# Altium PCB classyTKL_MXHS.PcbDoc (part 1 of 2)
Units mm, origin at the board's own origin, x right, y up, seen from the top; angles counter-clockwise.
Board outline 346.59 x 122.85 mm, 2 copper layers (Component Side, Bottom Layer), stack 1.571 mm thick; 194 components, 125 nets, 948 pads, 130 vias.
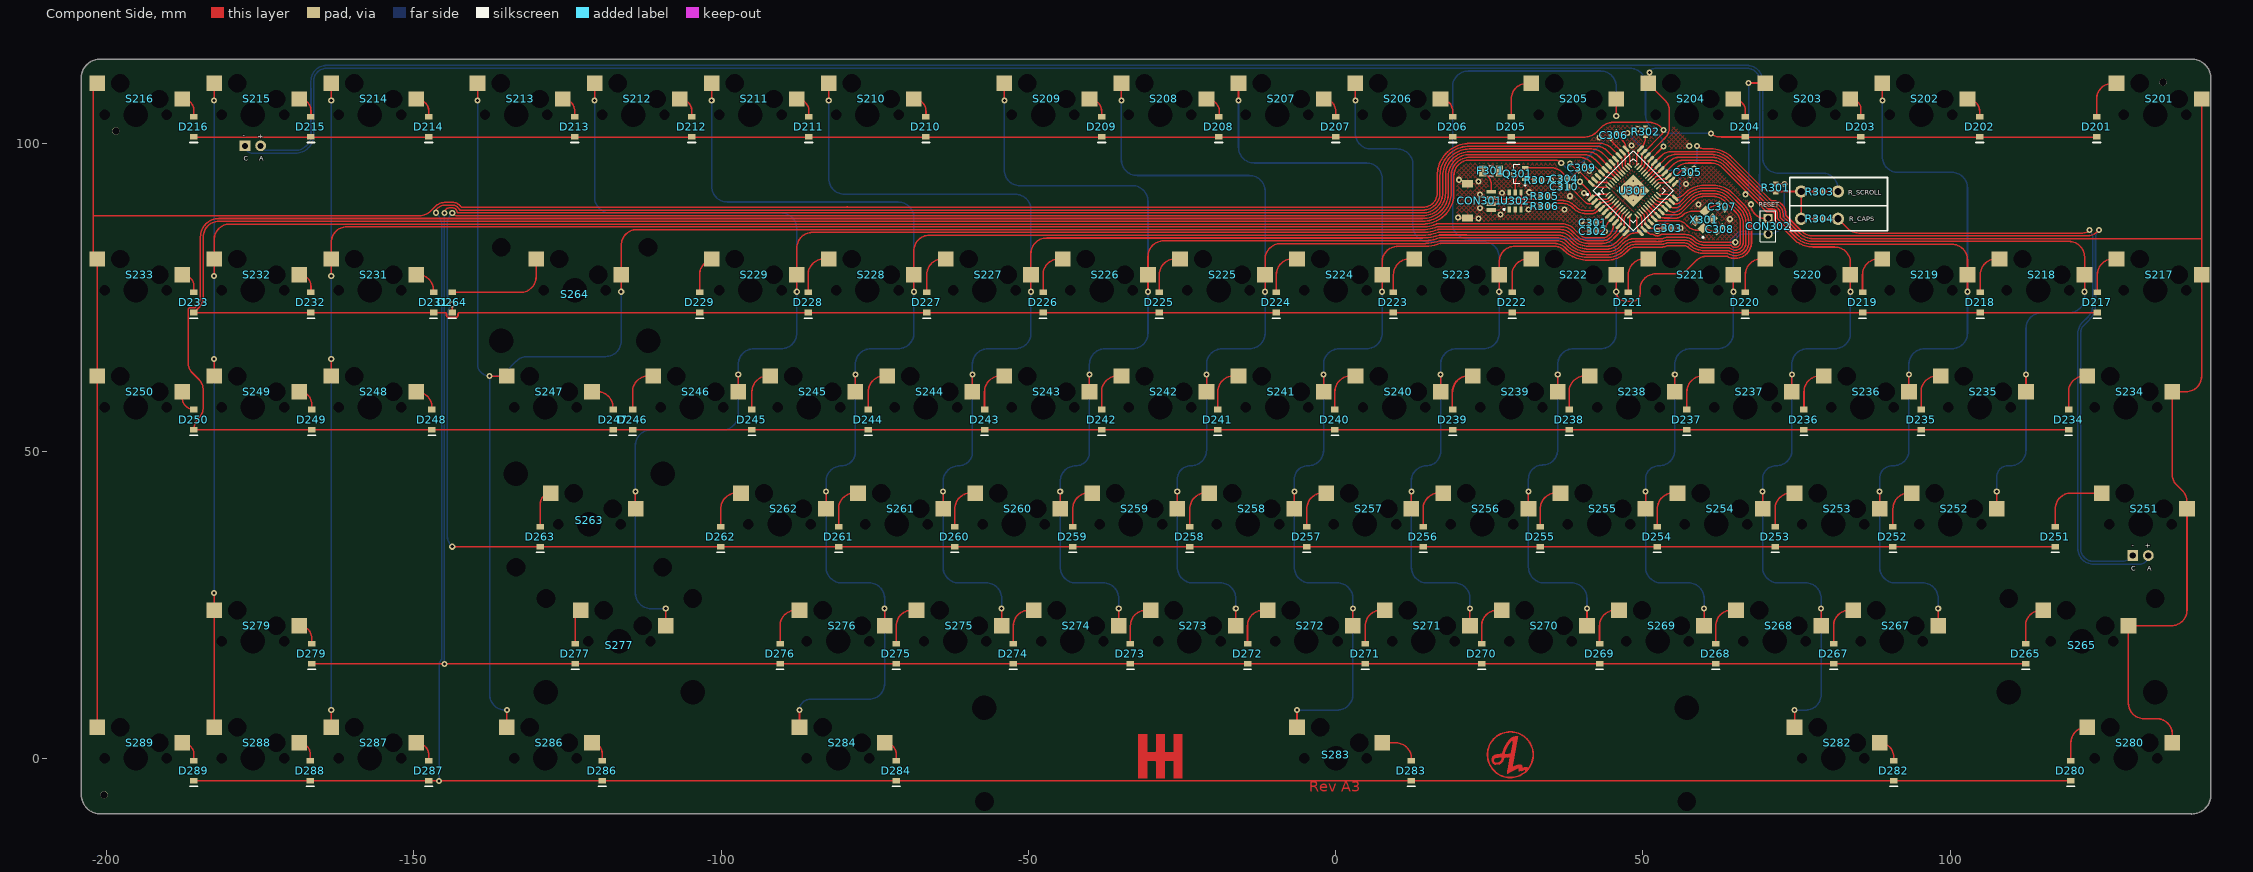
[diagram p0: Component Side view]
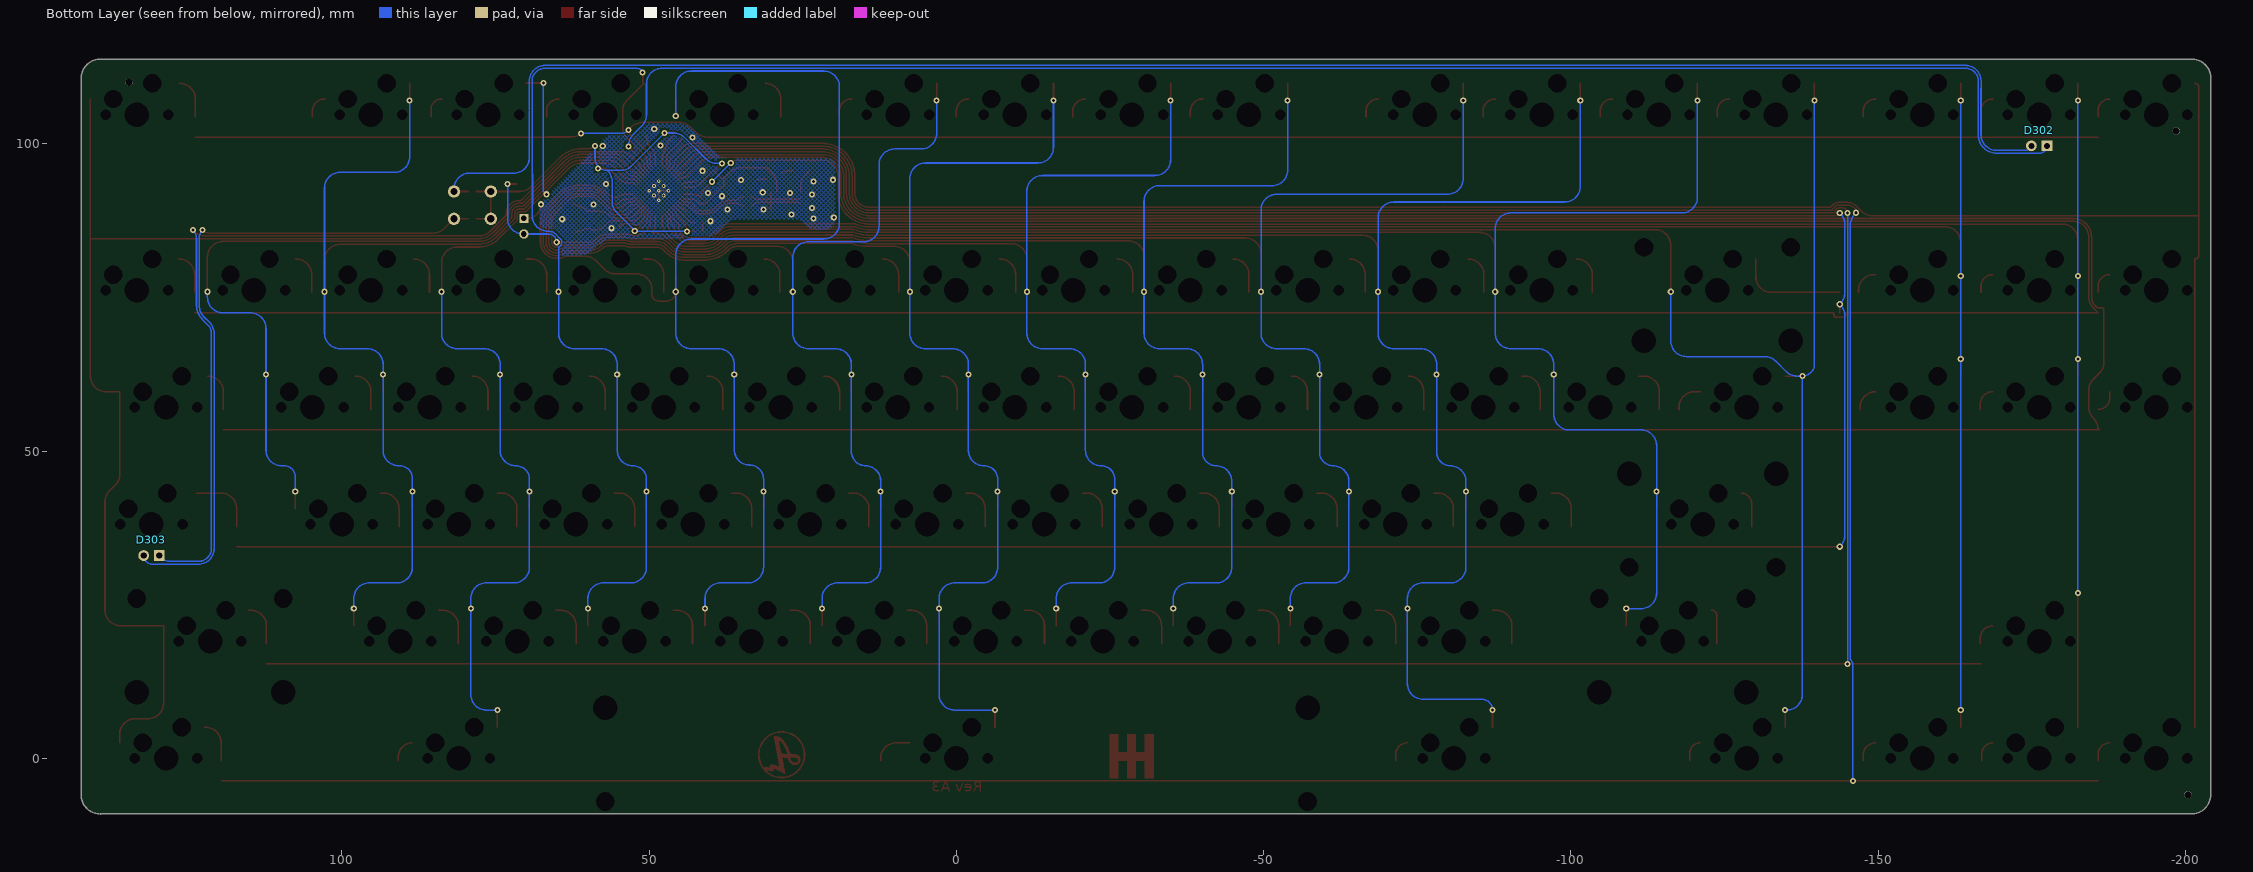
[diagram p1: Bottom Layer view, seen from below]
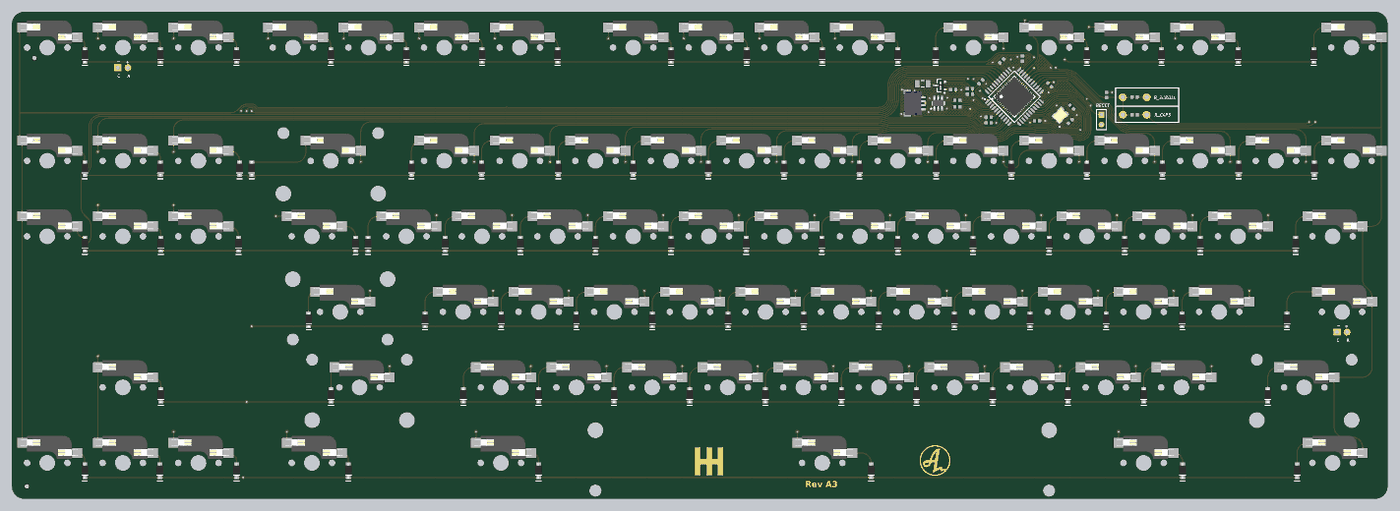
[diagram p3: 3D render of the assembled board from above, using the file's embedded part models]
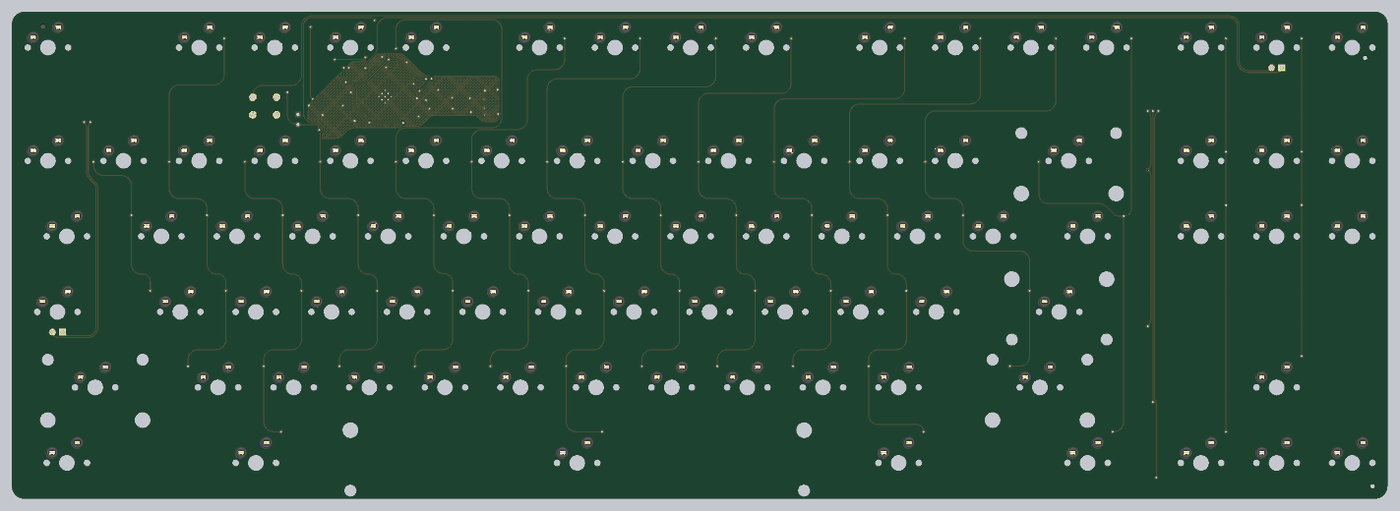
[diagram p4: 3D render of the assembled board from below, using the file's embedded part models]

## Layer stack, top to bottom
Top Solder: solder mask 0.0102, Solder Resist, Dk 3.5
Component Side: signal copper 0.0356
Dielectric 1: core 1.5, FR-4, Dk 4.2
Bottom Layer: signal copper 0.0356
Solder Side: solder mask 0.0102, Solder Resist, Dk 3.5

## Board outline
-204.127,-5.981 cw(c-204.032,-5.896) -204.159,-5.896 -204.159,110.685 cw(c-201.032,110.685) -201.032,113.812 cw(c-201.032,113.685) -200.974,113.798 139.295,113.798 cw(c139.295,110.671) 142.423,110.671 142.423,-5.883 cw(c142.299,-5.915) 142.427,-5.915 cw(c139.299,-5.915) 139.299,-9.042 cw(c139.299,-8.915) 139.233,-9.023 -201,-9.023 cw(c-201,-5.896)

## Design rules (kind name [scope] priority, off if disabled: settings)
Clearance [All] p1: gap=0.2 ignorepadtopadclearanceinfootprint=FALSE except(0: Arc-Hole Track-Hole SMDPad-Hole THPad-Hole Via-Hole Fill-Hole Poly-Hole Region-Hole Text-Hole; 0.254: THPad-THPad THPad-Via THPad-Fill THPad-Poly THPad-Region THPad-Text Via-Via Via-Fill Via-Poly Via-Region Via-Text Fill-Fill Fill-Poly Fill-Region Fill-Text Poly-Poly Poly-Region Poly-Text Region-Region Region-Text Text-Text)
ComponentClearance [InComponent('No Component') And OnLayer('Component Side')] p1: gap=0.254 collisioncheckmode=3 verticalgap=0.254 showdistances=FALSE
DiffPairsRouting DiffPairsRouting_USB [InDifferentialPairClass('All Differential Pairs')] p1: maxlimit=0.254 minlimit=0.203 mostfreqgap=0.203 toplayer_minwidth=0.152 toplayer_maxwidth=0.381 toplayer_prefwidth=0.152 bottomlayer_minwidth=0.152 bottomlayer_maxwidth=0.381 bottomlayer_prefwidth=0.152 maxuncoupledlength=12.7
DiffPairsRouting [All] p2: maxlimit=0.254 minlimit=0.254 mostfreqgap=0.254 toplayer_minwidth=0.381 toplayer_maxwidth=0.381 toplayer_prefwidth=0.381 bottomlayer_minwidth=0.381 bottomlayer_maxwidth=0.381 bottomlayer_prefwidth=0.381 maxuncoupledlength=12.7
HoleSize [All] p1: absolutevalues=TRUE maxlimit=20 minlimit=0.025 maxpercent=80.000 minpercent=20.000
MatchedLengths MatchedLengths_USB_DiffPairs_1 [All] p1: tolerance=0.127 checknetsindiffpair=TRUE checkdiffpairvsdiffpair=FALSE checkxsignals=FALSE checkothers=FALSE
MatchedLengths MatchedLengths_USB_DiffPairs [All] p2: tolerance=0.127 checknetsindiffpair=TRUE checkdiffpairvsdiffpair=FALSE checkxsignals=FALSE checkothers=FALSE
PolygonConnect PolygonConnect_1 [All vs IsVia] p1: connectstyle=Direct reliefconductorwidth=0.254 reliefentries=4 polygonreliefangle="90 Angle" airgapwidth=0.254
PolygonConnect [All] p2: connectstyle=Relief reliefconductorwidth=0.254 reliefentries=4 polygonreliefangle="90 Angle" airgapwidth=0.254
RoutingVias [All] p1: holewidth=0.711 width=1.27 viastyle="Through Hole" minholewidth=0.711 minwidth=1.27 maxholewidth=0.711 maxwidth=1.27
SolderMaskExpansion [All] p1: expansion=0.102 istentingtop=FALSE
Width [All] p1: maxlimit=0.254 minlimit=0.203 preferedwidth=0.254
27 further rules are at their usual default settings.

## Classes and differential pairs
component class Designator: C201 C202 C203 C204 C205 C206 D201 D202 D203 D204 D205 D206 D207 D208 D209 D210 D211 D212 D213 D214 D215 D216 D217 D218 D219 D220 D221 D222 D223 D224 D225 D226 D227 D228 D229 D231 D232 D233 D234 D235 D236 D237 D238 D239 D240 D241 D242 D243 D244 D245 D246 D247 D248 D249 D250 D251 D252 D253 D254 D255 D256 D257 D258 D259 D260 D261 D262 D263 D264 D265 D267 D268 D269 D270 D271 D272 D273 D274 D275 D276 D277 D279 D280 D282 D283 D284 D286 D287 D288 D289 S201 S202 S203 S204 S205 S206 S207 S208 S209 S210 S211 S212 S213 S214 S215 S216 S217 S218 S219 S220 S221 S222 S223 S224 S225 S226 S227 S228 S229 S231 S232 S233 S234 S235 S236 S237 S238 S239 S240 S241 S242 S243 S244 S245 S246 S247 S248 S249 S250 S251 S252 S253 S254 S255 S256 S257 S258 S259 S260 S261 S262 S263 S264 S265 S267 S268 S269 S270 S271 S272 S273 S274 S275 S276 S277 S279 S280 S282 S283 S284 S286 S287 S288 S289
differential pair D: +D_P -D_N
differential pair D_PRE: +D_PRE_P -D_PRE_N

## Components (designator, comment, footprint, x,y, rotation, side; value= is the part's Value field where it differs from the comment)
C301 "" C0603[1608] 41.915,87.178 r0 top value=1uF
C302 "" C0603[1608] 41.915,85.781 r0 top value=0.1uF
C303 "" C0603[1608] 54.107,86.289 r180 top value=0.1uF
C304 "" C0603[1608] 37.211,94.361 r0 top value=4,7uF
C305 "" C0603[1608] 57.277,95.377 r135 top value=0.1uF
C306 "" C0603[1608] 45.217,101.402 r45 top value=0.1uF
C307 "" C0603[1608] 62.865,89.789 r135 top value=15pF
C308 "" C0603[1608] 62.484,86.106 r225 top value=15pF
C309 "" C0603[1608] 40.005,96.139 r225 top value=0.1uF
C310 "" C0603[1608] 37.216,93.02 r0 top value=0.1uF
CON301 "Header 5" "JST SM04B-SRSS-TB" 21.468,93.54 r270 top
CON302 "Header 2" HDR1X2 70.358,87.884 r270 top
D201 "Diode" SOD-123 123.83,102.775 r90 top
D202 "Diode" SOD-123 104.78,102.775 r90 top
D203 "Diode" SOD-123 85.476,102.775 r90 top
D204 "Diode" SOD-123 66.68,102.775 r90 top
D205 "Diode" SOD-123 28.58,102.775 r90 top
D206 "Diode" SOD-123 19.055,102.775 r90 top
D207 "Diode" SOD-123 0.005,102.775 r90 top
D208 "Diode" SOD-123 -19.045,102.775 r90 top
D209 "Diode" SOD-123 -38.095,102.775 r90 top
D210 "Diode" SOD-123 -66.67,102.775 r90 top
D211 "Diode" SOD-123 -85.72,102.775 r90 top
D212 "Diode" SOD-123 -104.77,102.775 r90 top
D213 "Diode" SOD-123 -123.82,102.775 r90 top
D214 "Diode" SOD-123 -147.569,102.775 r90 top
D215 "Diode" SOD-123 -166.746,102.775 r90 top
D216 "Diode" SOD-123 -185.796,102.775 r90 top
D217 "Diode" SOD-123 123.957,74.2 r90 top
D218 "Diode" SOD-123 104.907,74.2 r90 top
D219 "Diode" SOD-123 85.73,74.2 r90 top
D220 "Diode" SOD-123 66.675,74.2 r90 top
D221 "Diode" SOD-123 47.63,74.2 r90 top
D222 "Diode" SOD-123 28.707,74.2 r90 top
D223 "Diode" SOD-123 9.403,74.2 r90 top
D224 "Diode" SOD-123 -9.647,74.2 r90 top
D225 "Diode" SOD-123 -28.697,74.2 r90 top
D226 "Diode" SOD-123 -47.62,74.2 r90 top
D227 "Diode" SOD-123 -66.543,74.2 r90 top
D228 "Diode" SOD-123 -85.847,74.2 r90 top
D229 "Diode" SOD-123 -103.5,74.2 r90 top
D231 "Diode" SOD-123 -146.807,74.2 r90 top
D232 "Diode" SOD-123 -166.746,74.2 r90 top
D233 "Diode" SOD-123 -185.796,74.2 r90 top
D234 "Diode" SOD-123 119.258,55.15 r90 top
D235 "Diode" SOD-123 95.255,55.15 r90 top
D236 "Diode" SOD-123 76.205,55.15 r90 top
D237 "Diode" SOD-123 57.155,55.15 r90 top
D238 "Diode" SOD-123 37.978,55.15 r90 top
D239 "Diode" SOD-123 19.055,55.15 r90 top
D240 "Diode" SOD-123 -0.122,55.15 r90 top
D241 "Diode" SOD-123 -19.172,55.15 r90 top
D242 "Diode" SOD-123 -38.095,55.15 r90 top
D243 "Diode" SOD-123 -57.145,55.15 r90 top
D244 "Diode" SOD-123 -76.068,55.15 r90 top
D245 "Diode" SOD-123 -94.991,55.15 r90 top
D246 "Diode" SOD-123 -114.422,55.15 r90 top
D247 "Diode" SOD-123 -117.597,55.15 r90 top
D248 "Diode" SOD-123 -147.061,55.15 r90 top
D249 "Diode" SOD-123 -166.619,55.15 r90 top
D250 "Diode" SOD-123 -185.796,55.15 r90 top
D251 "Diode" SOD-123 117.099,36.1 r90 top
D252 "Diode" SOD-123 90.683,36.1 r90 top
D253 "Diode" SOD-123 71.506,36.1 r90 top
D254 "Diode" SOD-123 52.329,36.1 r90 top
D255 "Diode" SOD-123 33.279,36.1 r90 top
D256 "Diode" SOD-123 14.229,36.1 r90 top
D257 "Diode" SOD-123 -4.694,36.1 r90 top
D258 "Diode" SOD-123 -23.744,36.1 r90 top
D259 "Diode" SOD-123 -42.794,36.1 r90 top
D260 "Diode" SOD-123 -61.971,36.1 r90 top
D261 "Diode" SOD-123 -80.894,36.1 r90 top
D262 "Diode" SOD-123 -100.071,36.1 r90 top
D263 "Diode" SOD-123 -129.413,36.1 r90 top
D264 "Diode" SOD-123 -143.759,74.2 r90 top
D265 "Diode" SOD-123 112.268,17.05 r90 top
D267 "Diode" SOD-123 81.031,17.05 r90 top
D268 "Diode" SOD-123 61.854,17.05 r90 top
D269 "Diode" SOD-123 42.931,17.05 r90 top
D270 "Diode" SOD-123 23.754,17.05 r90 top
D271 "Diode" SOD-123 4.831,17.05 r90 top
D272 "Diode" SOD-123 -14.346,17.05 r90 top
D273 "Diode" SOD-123 -33.396,17.05 r90 top
D274 "Diode" SOD-123 -52.446,17.05 r90 top
D275 "Diode" SOD-123 -71.496,17.05 r90 top
D276 "Diode" SOD-123 -90.419,17.05 r90 top
D277 "Diode" SOD-123 -123.75,17.05 r90 top
D279 "Diode" SOD-123 -166.619,17.05 r90 top
D280 "Diode" SOD-123 119.639,-2 r90 top
D282 "Diode" SOD-123 90.81,-2 r90 top
D283 "Diode" SOD-123 12.324,-2 r90 top
D284 "Diode" SOD-123 -71.496,-2 r90 top
D286 "Diode" SOD-123 -119.375,-2 r90 top
D287 "Diode" SOD-123 -147.569,-2 r90 top
D288 "Diode" SOD-123 -166.873,-2 r90 top
D289 "Diode" SOD-123 -185.796,-2 r90 top
D302 "LED0" "MX-SWITCH - LED" -176.213,104.775 r180 bottom
D303 "LED0" "MX-switch - LED" 130.968,38.1 r180 bottom
F301 "Fuse" C1206[3216] 25.273,95.631 r0 top
Q301 "PMOS-2" SOT-23-3 29.639,95.179 r180 top
R301 "Res1" R0603[1608] 71.628,92.837 r90 top value=10K
R302 "Res1" R0603[1608] 50.419,101.981 r90 top value=10K
R303 "Res1" "R0603[1608] - THT" 78.745,92.258 r0 top value=150
R304 "Res1" "R0603[1608] - THT" 78.745,87.813 r0 top value=150
R305 "Res1" R0603[1608] 34.041,91.496 r180 top value=22
R306 "Res1" R0603[1608] 34.041,89.845 r180 top value=22
R307 "Res1" R0603[1608] 33.02,94.107 r0 top value=10K
S201 "MX" MXHS-switch 133.349,104.775 r180 bottom locked
S202 "MX" MXHS-switch_Switched_Pol 95.249,104.775 r180 bottom locked
S203 "MX" MXHS-switch_Switched_Pol 76.199,104.775 r180 bottom locked
S204 "MX" MXHS-switch_Switched_Pol 57.149,104.775 r180 bottom locked
S205 "MX" MXHS-switch 38.099,104.775 r180 bottom locked
S206 "MX" MXHS-switch_Switched_Pol 9.494,104.775 r180 bottom locked
S207 "MX" MXHS-switch_Switched_Pol -9.526,104.775 r180 bottom locked
S208 "MX" MXHS-switch_Switched_Pol -28.576,104.775 r180 bottom locked
S209 "MX" MXHS-switch_Switched_Pol -47.626,104.775 r180 bottom locked
S210 "MX" MXHS-switch_Switched_Pol -76.201,104.775 r180 bottom locked
S211 "MX" MXHS-switch_Switched_Pol -95.251,104.775 r180 bottom locked
S212 "MX" MXHS-switch_Switched_Pol -114.301,104.775 r180 bottom locked
S213 "MX" MXHS-switch_Switched_Pol -133.351,104.775 r180 bottom locked
S214 "MX" MXHS-switch_Switched_Pol -157.162,104.775 r180 bottom locked
S215 "MX" MXHS-switch_Switched_Pol -176.213,104.775 r180 bottom locked
S216 "MX" MXHS-switch_Switched_Pol -195.263,104.775 r180 bottom locked
S217 "MX" MXHS-switch 133.349,76.2 r180 bottom locked
S218 "MX" MXHS-switch 114.299,76.2 r180 bottom locked
S219 "MX" MXHS-switch 95.249,76.2 r180 bottom locked
S220 "MX" MXHS-switch 76.199,76.2 r180 bottom locked
S221 "MX" MXHS-switch 57.149,76.2 r180 bottom locked
S222 "MX" MXHS-switch 38.099,76.2 r180 bottom locked
S223 "MX" MXHS-switch 19.049,76.2 r180 bottom locked
S224 "MX" MXHS-switch -0.001,76.2 r180 bottom locked
S225 "MX" MXHS-switch -19.051,76.2 r180 bottom locked
S226 "MX" MXHS-switch -38.101,76.2 r180 bottom locked
S227 "MX" MXHS-switch -57.151,76.2 r180 bottom locked
S228 "MX" MXHS-switch -76.201,76.2 r180 bottom locked
S229 "MX" MXHS-switch -95.251,76.2 r180 bottom locked
S231 "MX" MXHS-switch_Switched_Pol -157.162,76.2 r180 bottom locked
S232 "MX" MXHS-switch_Switched_Pol -176.213,76.2 r180 bottom locked
S233 "MX" MXHS-switch_Switched_Pol -195.263,76.2 r180 bottom locked
S234 "MX" "MXHS-switch - 1.5U" 128.587,57.15 r180 bottom locked
S235 "MX" MXHS-switch 104.774,57.15 r180 bottom locked
S236 "MX" MXHS-switch 85.724,57.15 r180 bottom locked
S237 "MX" MXHS-switch 66.674,57.15 r180 bottom locked
S238 "MX" MXHS-switch 47.624,57.15 r180 bottom locked
S239 "MX" MXHS-switch 28.574,57.15 r180 bottom locked
S240 "MX" MXHS-switch 9.524,57.15 r180 bottom locked
S241 "MX" MXHS-switch -9.526,57.15 r180 bottom locked
S242 "MX" MXHS-switch -28.576,57.15 r180 bottom locked
S243 "MX" MXHS-switch -47.626,57.15 r180 bottom locked
S244 "MX" MXHS-switch -66.676,57.15 r180 bottom locked
S245 "MX" MXHS-switch -85.726,57.15 r180 bottom locked
S246 "MX" MXHS-switch -104.776,57.15 r180 bottom locked
S247 "MX" MXHS-switch_Switched_Pol -128.588,57.15 r180 bottom locked
S248 "MX" MXHS-switch_Switched_Pol -157.162,57.15 r180 bottom locked
S249 "MX" MXHS-switch_Switched_Pol -176.213,57.15 r180 bottom locked
S250 "MX" MXHS-switch_Switched_Pol -195.263,57.15 r180 bottom locked
S251 "MX" "MXHS-switch - CAPS_stepped" 126.206,38.1 r180 bottom locked
S252 "MX" MXHS-switch 100.012,38.1 r180 bottom locked
S253 "MX" MXHS-switch 80.962,38.1 r180 bottom locked
S254 "MX" MXHS-switch 61.912,38.1 r180 bottom locked
S255 "MX" MXHS-switch 42.862,38.1 r180 bottom locked
S256 "MX" MXHS-switch 23.812,38.1 r180 bottom locked
S257 "MX" MXHS-switch 4.762,38.1 r180 bottom locked
S258 "MX" MXHS-switch -14.288,38.1 r180 bottom locked
S259 "MX" MXHS-switch -33.338,38.1 r180 bottom locked
S260 "MX" MXHS-switch -52.388,38.1 r180 bottom locked
S261 "MX" MXHS-switch -71.438,38.1 r180 bottom locked
S262 "MX" MXHS-switch -90.488,38.1 r180 bottom locked
S263 "MX" "MXHS-switch - 2.25U - rotated stab" -121.451,38.1 r180 bottom locked
S264 "MX" "MXHS-switch - 2.25U" -123.826,76.2 r180 bottom locked
S265 "MX" "MXHS-switch - 2.25U" 121.443,19.05 r180 bottom locked
S267 "MX" MXHS-switch 90.487,19.05 r180 bottom locked
S268 "MX" MXHS-switch 71.437,19.05 r180 bottom locked
S269 "MX" MXHS-switch 52.387,19.05 r180 bottom locked
S270 "MX" MXHS-switch 33.337,19.05 r180 bottom locked
S271 "MX" MXHS-switch 14.287,19.05 r180 bottom locked
S272 "MX" MXHS-switch -4.763,19.05 r180 bottom locked
S273 "MX" MXHS-switch -23.813,19.05 r180 bottom locked
S274 "MX" MXHS-switch -42.862,19.05 r180 bottom locked
S275 "MX" MXHS-switch -61.913,19.05 r180 bottom locked
S276 "MX" MXHS-switch -80.963,19.05 r180 bottom locked
S277 "MX" "MXHS-switch - 2.75U" -116.581,19.05 r180 bottom locked
S279 "MX" MXHS-switch_Switched_Pol -176.213,19.05 r180 bottom locked
S280 "MX" "MXHS-switch - 1.5U" 128.587,0 r180 bottom locked
S282 "MX" MXHS-switch_Switched_Pol 80.962,0 r180 bottom locked
S283 "MX" "MXHS-switch - 7u space" 0,0 r0 bottom locked
S284 "MX" MXHS-switch_Switched_Pol -80.962,0 r180 bottom locked
S286 "MX" MXHS-switch_Switched_Pol -128.588,0 r180 bottom locked
S287 "MX" MXHS-switch_Switched_Pol -157.163,0 r180 bottom locked
S288 "MX" MXHS-switch_Switched_Pol -176.213,0 r180 bottom locked
S289 "MX" MXHS-switch_Switched_Pol -195.263,0 r180 bottom locked
U301 "ATMEGA32U4" ATMEGA32U4-COMBO 48.411,92.392 r45 top
U302 "SRV05" SOT-23-6 29.215,90.734 r90 top
X301 "XTAL" XTAL-3225 59.949,87.686 r45 top

## Footprints (in the part's own frame and the unit in brackets; to place one, negate y for a bottom-side part, rotate by r counter-clockwise, add the part's x,y. Pads: shape width x height; smd on the part's side, far side on the other; paste and mask are expansions set on the pad)
ATMEGA32U4-COMBO [mm] "QFP, 44-Leads, Body 9,95x9,95mm, Pitch 0,80mm, IPC Medium Density"
  rect 1.35x0.5 smd: 1(-5.675,4)
  oval 1.05x0.25 smd: 1(-3.325,2.5) 2(-3.325,2) 3(-3.325,1.5) 4(-3.325,1) 5(-3.325,0.5) 6(-3.325,0) 7(-3.325,-0.5) 8(-3.325,-1) 9(-3.325,-1.5) 10(-3.325,-2) 11(-3.325,-2.5) 23(3.325,-2.5) 24(3.325,-2) 25(3.325,-1.5) 26(3.325,-1) 27(3.325,-0.5) 28(3.325,0) 29(3.325,0.5) 30(3.325,1) 31(3.325,1.5) 32(3.325,2) 33(3.325,2.5)
  oval 1.35x0.5 smd: 2(-5.675,3.2) 3(-5.675,2.4) 4(-5.675,1.6) 5(-5.675,0.8) 6(-5.675,0) 7(-5.675,-0.8) 8(-5.675,-1.6) 9(-5.675,-2.4) 10(-5.675,-3.2) 11(-5.675,-4) 23(5.675,-4) 24(5.675,-3.2) 25(5.675,-2.4) 26(5.675,-1.6) 27(5.675,-0.8) 28(5.675,0) 29(5.675,0.8) 30(5.675,1.6) 31(5.675,2.4) 32(5.675,3.2) 33(5.675,4)
  oval 0.5x1.35 smd: 12(-4,-5.675) 13(-3.2,-5.675) 14(-2.4,-5.675) 15(-1.6,-5.675) 16(-0.8,-5.675) 17(0,-5.675) 18(0.8,-5.675) 19(1.6,-5.675) 20(2.4,-5.675) 21(3.2,-5.675) 22(4,-5.675) 34(4,5.675) 35(3.2,5.675) 36(2.4,5.675) 37(1.6,5.675) 38(0.8,5.675) 39(0,5.675) 40(-0.8,5.675) 41(-1.6,5.675) 42(-2.4,5.675) 43(-3.2,5.675) 44(-4,5.675)
  oval 0.25x1.05 smd: 12(-2.5,-3.325) 13(-2,-3.325) 14(-1.5,-3.325) 15(-1,-3.325) 16(-0.5,-3.325) 17(0,-3.325) 18(0.5,-3.325) 19(1,-3.325) 20(1.5,-3.325) 21(2,-3.325) 22(2.5,-3.325) 34(2.5,3.325) 35(2,3.325) 36(1.5,3.325) 37(1,3.325) 38(0.5,3.325) 39(0,3.325) 40(-0.5,3.325) 41(-1,3.325) 42(-1.5,3.325) 43(-2,3.325) 44(-2.5,3.325)
  rect 3.81x3.81 smd paste-1000: 43(0,0)
  silkscreen extent -5.8,-4.6 4.6,4.92, body extent -3.6,-3.6 3.6,3.6, height 1
C0603[1608] [mm] "Chip Resistor, 2-Leads, Body 1,57x0,80mm, IPC Medium Density"
  rect 0.8x0.85 smd: 1(-0.65,0) 2(0.65,0)
  body extent -0.83,-0.43 0.82,0.43, height 0.5
C1206[3216] [mm]
  rect 1.2x1.8 smd: 1(-1.35,0) 2(1.35,0)
  silkscreen extent -0.35,-0.8 0.35,0.8, body extent -1.6,-0.9 1.6,0.9, height 1.2
HDR1X2 [mm] "Connector; Header; 2 Position"
  rect 1.5x1.5 hole 0.9 mask+0.102: 1(0,0)
  round 1.5 hole 0.9 mask+0.102: 2(2.54,0)
  silkscreen extent -1.27,-1.27 3.81,1.27
"JST SM04B-SRSS-TB" [mm]
  rect 0.6x1.55 smd: 1(1.3,3.875) 2(2.3,3.875) 3(3.3,3.875) 4(4.3,3.875)
  rect 1.2x1.8 smd: 5(0,0) 5(5.6,0)
  body extent -0.21,-0.76 5.79,4.19, height 3.25
"MX-SWITCH - LED" [mm]
  round 1.75 hole 1 mask+0.102: 1(-1.27,-5.08)
  rect 1.75x1.75 hole 1 mask+0.102: 2(1.27,-5.08)
  round 1 on Mech14: ""(0,0)
"MX-switch - LED" [mm]
  round 1.75 hole 1 mask+0.102: 1(-1.27,-5.08)
  rect 1.75x1.75 hole 1 mask+0.102: 2(1.27,-5.08)
  round 1 on Mech14: ""(0,0)
MXHS-switch [mm]
  rect 2.55x2.5 smd far side: 1(6.29,5.08) 2(-7.56,2.54)
  round 1 hole 1.702 unplated: ""(-5.08,0) ""(5.08,0)
  round 0 hole 3 unplated: ""(-3.81,2.54) ""(2.54,5.08)
  round 1 hole 3.988 unplated: ""(0,0)
  body extent -7.76,0.97 6.74,6.86, height 0.8
"MXHS-switch - 1.5U" [mm]
  rect 2.55x2.5 smd far side: 1(6.29,5.08) 2(-7.56,2.54)
  round 1 hole 1.702 unplated: ""(-5.08,0) ""(5.08,0)
  round 0 hole 3 unplated: ""(-3.81,2.54) ""(2.54,5.08)
  round 1 hole 3.988 unplated: ""(0,0)
  round 1 on Mech14: ""(0,0)
  body extent -7.76,0.97 6.74,6.86, height 0.8
"MXHS-switch - 2.25U" [mm]
  rect 2.55x2.5 smd far side: 1(6.29,5.08) 2(-7.56,2.54)
  round 1.524 hole 3.988 unplated: ""(-11.938,-8.255) ""(11.938,-8.255)
  round 1.524 hole 3.048 unplated: ""(-11.938,6.985) ""(11.938,6.985)
  round 1 hole 1.702 unplated: ""(-5.08,0) ""(5.08,0)
  round 0 hole 3 unplated: ""(-3.81,2.54) ""(2.54,5.08)
  round 1 hole 3.988 unplated: ""(0,0)
  round 1 on Mech14: ""(0,0) ""(0,0)
  body extent -7.76,0.97 6.74,6.86, height 0.8
"MXHS-switch - 2.25U - rotated stab" [mm]
  rect 2.55x2.5 smd far side: 1(6.29,5.08) 2(-7.56,2.54)
  round 1.524 hole 3.048 unplated: ""(-11.938,-6.985) ""(11.938,-6.985)
  round 1.524 hole 3.988 unplated: ""(-11.938,8.255) ""(11.938,8.255)
  round 1 hole 1.702 unplated: ""(-5.08,0) ""(5.08,0)
  round 0 hole 3 unplated: ""(-3.81,2.54) ""(2.54,5.08)
  round 1 hole 3.988 unplated: ""(0,0)
  round 1 on Mech14: ""(0,0) ""(0,0)
  body extent -7.76,0.97 6.74,6.86, height 0.8
"MXHS-switch - 2.75U" [mm]
  rect 2.55x2.5 smd far side: 1(6.29,5.08) 2(-7.56,2.54)
  round 1.524 hole 3.988 unplated: ""(-11.938,-8.255) ""(11.938,-8.255)
  round 1.524 hole 3.048 unplated: ""(-11.938,6.985) ""(11.938,6.985)
  round 1 hole 1.702 unplated: ""(-5.08,0) ""(5.08,0)
  round 0 hole 3 unplated: ""(-3.81,2.54) ""(2.54,5.08)
  round 1 hole 3.988 unplated: ""(0,0)
  round 1 on Mech14: ""(0,0)
  body extent -7.76,0.97 6.74,6.86, height 0.8
"MXHS-switch - 7u space" [mm]
  rect 2.55x2.5 smd far side: 1(-6.29,-5.08) 2(7.56,-2.54)
  round 1.524 hole 3.988 unplated: ""(-57.15,-8.255) ""(57.15,-8.255)
  round 1.524 hole 3.048 unplated: ""(-57.15,6.985) ""(57.15,6.985)
  round 1 hole 1.702 unplated: ""(-5.08,0) ""(5.08,0)
  round 0 hole 3 unplated: ""(-2.54,-5.08) ""(3.81,-2.54)
  round 1 hole 3.988 unplated: ""(0,0)
  round 1 on Mech14: ""(0,0) ""(0,0)
  body extent -6.74,-6.86 7.76,-0.97, height 0.8
"MXHS-switch - CAPS_stepped" [mm]
  rect 2.55x2.5 smd far side: 1(1.528,5.08) 2(-12.323,2.54)
  round 1 hole 1.702 unplated: ""(-9.842,0) ""(0.318,0)
  round 0 hole 3 unplated: ""(-8.572,2.54) ""(-2.222,5.08)
  round 1 hole 3.988 unplated: ""(-4.763,0)
  round 1 on Mech14: ""(-4.763,0) ""(0,0)
  body extent -12.52,0.97 1.98,6.86, height 0.8
MXHS-switch_Switched_Pol [mm]
  rect 2.55x2.5 smd far side: 1(-7.56,2.54) 2(6.29,5.08)
  round 1 hole 1.702 unplated: ""(-5.08,0) ""(5.08,0)
  round 0 hole 3 unplated: ""(-3.81,2.54) ""(2.54,5.08)
  round 1 hole 3.988 unplated: ""(0,0)
  body extent -7.76,0.97 6.74,6.86, height 0.8
R0603[1608] [mm] "Chip Resistor, 2-Leads, Body 1,57x0,80mm, IPC Medium Density"
  rect 0.8x0.85 smd: 1(-0.65,0) 2(0.65,0)
  body extent -0.83,-0.43 0.82,0.43, height 0.5
"R0603[1608] - THT" [mm] "Chip Resistor, 2-Leads, Body 1,57x0,80mm, IPC Medium Density"
  round 2 hole 1.2: 1(-3,0) 2(3,0)
  rect 0.8x0.85 smd: 1(-0.65,0) 2(0.65,0)
  body extent -0.83,-0.43 0.82,0.43, height 0.5
SOD-123 [mm]
  rect 0.91x1.22 smd: 1(1.635,0) 2(-1.635,0)
  silkscreen extent -2.54,-0.64 -2.54,0.63, body extent -1.87,-0.85 1.88,0.85, height 1.2
SOT-23-3 [mm] "3.3v regulator, used in Windsond S2 proto 1"
  rect 1x0.55 smd: 1(-1.2,0.95) 2(-1.2,-0.95) 3(1.2,0)
  silkscreen extent -1.33,-1.55 0.7,1.95, body extent -1.45,-1.5 1.1,1.5, height 1
SOT-23-6 [mm]
  rect 1x0.55 smd: 1(-1.375,0.95) 2(-1.375,0) 3(-1.375,-0.95) 4(1.375,-0.95) 5(1.375,0) 6(1.375,0.95)
  silkscreen extent -1.5,-1.55 0.46,1.92, body extent -1.37,-1.44 1.47,1.49, height 1.05
XTAL-3225 [mm]
  rect 1.4x1.2 smd: 1(-1.1,-0.85) 2(1.1,-0.85) 3(1.1,0.85) 4(-1.1,0.85)
  silkscreen extent -2.28,-2.03 -2.03,-1.78, body extent -1.6,-1.25 1.6,1.25, height 0.65

## Part data
C301: library part Cap, "Capacitor", LCSC MFG="Samsung Electro-Mechanics", LCSC Part #=C15849, MFG=KEMET, MFGPN=C0603C104M5RACTU, MRF.Part=CL10A105KB8NNNC, Version="0603 imperial"
C302 C303 C305 C306 C309 C310: library part Cap, "Capacitor", LCSC MFG=YAGEO, LCSC Part #=C14663, MFG=KEMET, MFGPN=C0603C104M5RACTU, MRF.Part=CC0603KRX7R9BB104, Version="0603 imperial"
C304: library part Cap, "Capacitor", LCSC MFG="Samsung Electro-Mechanics", LCSC Part #=C19666, MRF.Part=CL10A475KO8NNNC
C307 C308: library part Cap, "Capacitor", LCSC MFG="Samsung Electro-Mechanics", LCSC Part #=C1644, MRF.Part=CL10C150JB8NNNC, Version="0603 imperial"
CON301: "JST for USB daughter board", LCSC MFG="JST Sales America", LCSC Part #=C160404, MFG="JST Sales America Inc.", MFGPN=SM04B-SRSS-TB(LF)(SN), MRF.Part=SM04B-SRSS-TB(LF)(SN)
CON302: "Header, 2-Pin"
D201 D202 D203 D204 D205 D206 D207 D208 D209 D210 D211 D212 D213 D214 D215 D216 D217 D218 D219 D220 D221 D222 D223 D224 D225 D226 D227 D228 D229 D231 D232 D233 D234 D235 D236 D237 D238 D239 D240 D241 D242 D243 D244 D245 D246 D247 D248 D249 D250 D251 D252 D253 D254 D255 D256 D257 D258 D259 D260 D261 D262 D263 D264 D265 D267 D268 D269 D270 D271 D272 D273 D274 D275 D276 D277 D279 D280 D282 D283 D284 D286 D287 D288 D289: "Default Diode", LCSC MFG=ST(Semtech), LCSC Part #=C81598, MRF.Part=1N4148W, Version=SOD-123
D302 D303: "Typical INFRARED GaAs LED"
F301: library part "Fuse Thermal", "Thermal Fuse", LCSC MFG="Shenzhen JDT Fuse", LCSC Part #=C135338, MFG="Bel Fuse Inc.", MFGPN=0ZCJ0050FF2G, MRF.Part=ASMD1206-050
Q301: "P-Channel Power MOSFET", LCSC MFG="Vishay Intertech", LCSC Part #=C10487, MRF.Part=SI2301CDS-T1-GE3, Version=SOT23-3
R301 R302 R307: "Resistor", LCSC MFG="Uniroyal Elec", LCSC Part #=C25804, MFG="Panasonic Electronic Components", MFGPN=ERJ-3EKF5101V, MRF.Part=0603WAF1002T5E, Version="0603 imperial"
R303 R304: "Resistor", Version="0603 imperial"
R305 R306: "Resistor", LCSC MFG="Uniroyal Elec", LCSC Part #=C23345, MFG="Panasonic Electronic Components", MFGPN=ERJ-3EKF5101V, MRF.Part=0603WAF220JT5E, Version="0603 imperial"
S201 S202 S203 S204 S205 S206 S207 S208 S209 S210 S211 S212 S213 S214 S215 S216 S217 S218 S219 S220 S221 S222 S223 S224 S225 S226 S227 S228 S229 S231 S232 S233 S235 S236 S237 S238 S239 S240 S241 S242 S243 S244 S245 S246 S247 S248 S249 S250 S251 S252 S253 S254 S255 S256 S257 S258 S259 S260 S261 S262 S263 S264 S265 S267 S268 S269 S270 S271 S272 S273 S274 S275 S276 S277 S279 S280 S282 S283 S284 S286 S287 S288 S289: library part SW-PB, "Switch"
S234: library part SW-PB, "TAB"
U301: "MCU", LCSC MFG="Microchip Tech", LCSC Part #=C45874, MFG="Microchip Technology", MFGPN=ATMEGA32U4-MUR, MRF.Part=ATMEGA32U4-MUR
U302: LCSC MFG="ProTek Devices", LCSC Part #=C85364, MRF.Part=SRV05-4-P-T7
X301: "Crystal Oscillator", LCSC MFG="Yangxing Tech", LCSC Part #=C13738, MRF.Part=X322516MLB4SI

## Free pads (board coordinates)
  round 1.152 hole 1.152 unplated paste+0.148 mask+0.148: ""(-200.401,-5.913) ""(-198.501,102.108) ""(134.625,110.038)

## Via types
v1: diameter 1, hole 0.5, Component Side to Bottom Layer, tented both sides, 121 vias
v2: diameter 0.6, hole 0.3, Component Side to Bottom Layer, tented bottom, 9 vias

## Nets (pads, with @x,y where several pads share a name; then routed paths per layer and width w, separated by ;. In a path a pad name is that pad's centre, name@x,y a point inside that pad or via, vN(x,y) a via of type N, cw(c..) or ccw(c..) an arc to the next point about the centre after c; other vN are vias at no path point)
caps_led: D303.2 U301.29 | length 144.2
  Component Side w0.254: U301.29@50.408,95.096 51.29,95.978 ccw(c50.928,96.341) 51.44,96.341 cw(c51.953,96.341) 51.59,96.703 U301.29@51.858,96.97 52.898,98.01 cw(c54.694,96.214) 54.694,98.754 61.075,98.754 cw(c61.075,94.398) 64.156,97.478 68.561,93.072 70.593,91.04 70.783,90.851 ccw(c70.962,91.031) 70.962,90.777 71.108,90.777 cw(c71.108,88.634) 72.192,90.482 cw(c71.108,88.634) 73.224,88.972 cw(c71.108,88.634) 73.251,88.634 73.251,88.488 ccw(c73.505,88.488) 73.325,88.308 75.841,85.793 ccw(c77.637,87.589) 77.637,85.049 122.224,85.049 ccw(c122.224,87.589) 124.02,85.793 v1(124.206,85.979)
  Bottom Layer w0.254: v1(124.206,85.979) ccw(c125.563,84.622) 123.644,84.622 123.644,73.696 cw(c120.65,73.696) 122.81,71.623 ccw(c122.993,71.447) 122.78,71.585 cw(c120.65,72.969) 122.446,71.173 121.532,70.259 ccw(c123.317,69.179) 121.231,69.179 121.231,34.163 ccw(c123.317,34.163) 121.788,32.744 ccw(c123.317,34.163) 123.317,32.077 128.203,32.077 ccw(c128.203,32.331) 128.266,32.085 ccw(c127.63,34.544) 129.426,32.748 D303.2@129.698,33.02
col1: S201.2 S217.2 S234.2 S251.2 S265.2 S280.2 U301.28 | length 220
  Component Side w0.254: U301.28@50.762,94.743 U301.28@52.423,96.404 53.575,97.556 cw(c55.371,95.76) 55.371,98.3 61.075,98.3 cw(c61.075,94.398) 63.833,97.158 cw(c61.075,94.398) 63.835,97.157 cw(c63.513,96.836) 63.841,97.151 ccw(c64.024,97.326) 63.846,97.145 cw(c61.11,94.363) 63.871,97.121 65.256,95.736 67.859,93.132 70.595,90.397 ccw(c70.774,90.577) 70.774,90.323 71.108,90.323 cw(c71.108,88.634) 71.586,90.254 cw(c71.108,88.634) 72.797,88.634 72.797,88.3 ccw(c73.051,88.3) 72.871,88.12 73.384,87.608 75.52,85.472 ; 75.52,85.471 ccw(c77.637,87.589) 77.637,84.595 140.909,84.595 ; S280.2@136.147,2.54 136.147,3.937 ccw(c133.607,3.937) 133.607,6.477 131.543,6.477 cw(c131.543,9.017) 129.003,9.017 S265.2@129.003,21.59 135.988,21.59 ccw(c135.988,24.13) 138.528,24.13 S251.2@138.528,40.64 138.528,41.776 ccw(c135.988,41.776) 137.784,43.572 136.779,44.577 cw(c138.305,46.103) 136.147,46.103 S234.2@136.147,59.69 138.369,59.69 ccw(c138.369,62.23) 140.909,62.23 S217.2@140.909,78.74 140.909,84.595 ; S201.2@140.909,107.315 140.909,84.595
col2: S218.2 S235.2 S252.2 U301.27 | length 133.4
  Component Side w0.254: U301.27@51.115,94.389 51.82,95.093 cw(c52.202,94.711) 52.202,95.252 ccw(c52.202,95.735) 52.544,95.393 U301.27@52.989,95.839 54.253,97.102 cw(c56.049,95.306) 56.049,97.846 61.075,97.846 cw(c61.075,94.398) 63.513,96.836 ccw(c63.7,97.008) 63.522,96.827 cw(c61.11,94.363) 63.549,96.8 64.338,96.012 66.496,93.854 67.919,92.43 69.991,90.358 70.407,89.943 ccw(c70.586,90.123) 70.586,89.869 71.108,89.869 cw(c71.108,88.634) 71.458,89.818 cw(c71.108,88.634) 72.292,88.984 cw(c71.108,88.634) 72.343,88.634 72.343,88.112 ccw(c72.597,88.112) 72.417,87.932 75.199,85.151 ccw(c77.637,87.589) 77.637,84.141 119.319,84.141 cw(c119.319,81.601) 121.859,81.601 S218.2@121.859,78.74 v1(121.859,75.946) ; S252.2@107.572,40.64 v1(107.572,43.434) ; S235.2@112.334,59.69 v1(112.334,62.484)
  Bottom Layer w0.254: v1(107.572,43.434) 107.572,45.85 cw(c109.347,45.85) 109.347,47.625 109.794,47.625 ccw(c109.794,50.165) 112.334,50.165 v1(112.334,62.484) 112.334,69.977 cw(c114.874,69.977) 114.874,72.517 119.319,72.517 ccw(c119.319,75.057) 121.859,75.057 v1(121.859,75.946)
col3: S202.2 S219.2 S236.2 S253.2 S267.2 U301.26 | length 188.1
  Component Side w0.254: U301.26@51.469,94.036 51.982,94.549 ; 51.983,94.549 cw(c52.583,93.948) 52.583,94.798 ccw(c52.583,95.996) 53.431,95.149 U301.26@53.555,95.273 54.895,96.613 cw(c56.691,94.817) 56.691,97.357 61.11,97.357 cw(c61.11,94.363) 63.227,96.481 ; 63.227,96.48 69.122,90.585 70.218,89.489 ccw(c70.398,89.669) 70.398,89.415 71.108,89.415 cw(c71.108,88.634) 71.889,88.634 71.889,87.924 ccw(c72.143,87.924) 71.963,87.744 74.878,84.83 ccw(c77.637,87.589) 74.879,84.829 ccw(c77.637,87.589) 77.637,83.687 100.269,83.687 cw(c100.269,81.147) 102.809,81.147 S219.2@102.809,78.74 v1(102.81,75.946) ; S253.2@88.522,40.64 v1(88.522,43.434) ; v1(88.96,107.061) S202.2@88.959,109.855 ; S236.2@93.284,59.69 v1(93.284,62.484) ; S267.2@98.047,21.59 v1(98.047,24.384)
  Bottom Layer w0.254: v1(88.96,107.061) 88.96,97.917 ccw(c91.5,97.917) 91.5,95.377 100.27,95.377 cw(c100.27,92.837) 102.81,92.837 v1(102.81,75.946) 102.81,69.215 cw(c100.27,69.215) 100.27,66.675 95.824,66.675 ccw(c95.824,64.135) 93.284,64.135 v1(93.284,62.484) 93.284,50.165 cw(c90.744,50.165) 90.744,47.625 90.551,47.625 ccw(c90.551,45.596) 88.522,45.596 v1(88.522,43.434) 88.522,31.115 ccw(c91.062,31.115) 91.062,28.575 95.507,28.575 cw(c95.507,26.035) 98.047,26.035 v1(98.047,24.384)
col4: S203.2 S220.2 S237.2 S254.2 S268.2 S282.2 U301.25 | length 166.1
  Component Side w0.254: U301.25@51.822,93.682 52.143,94.002 cw(c52.837,93.307) 52.837,94.29 53.113,94.29 ccw(c53.113,95.715) U301.25@54.121,94.707 ; U301.25@54.121,94.707 55.572,96.159 cw(c57.368,94.363) 57.368,96.903 61.11,96.903 cw(c61.11,94.363) 62.906,96.159 70.031,89.035 ccw(c70.21,89.215) 70.21,88.961 71.108,88.961 cw(c71.108,88.634) 71.435,88.634 71.435,87.736 ccw(c71.689,87.736) 71.509,87.556 74.756,84.31 ccw(c76.552,86.106) 75.484,83.801 cw(c75.377,83.571) 75.501,83.792 ccw(c77.637,87.589) 77.637,83.233 81.219,83.233 cw(c81.219,80.693) 83.759,80.693 S220.2@83.759,78.74 v1(83.76,75.946) ; v1(67.183,109.922) S203.2@69.977,109.922 ; S254.2@69.472,40.64 v1(69.472,43.434) ; S237.2@74.234,59.69 v1(74.234,62.484) ; S282.2@74.672,5.08 v1(74.672,7.874) ; S268.2@78.997,21.59 v1(78.997,24.384)
  Bottom Layer w0.254: v1@66.929,91.821 ccw(c66.316,92.434) 67.183,92.434 v1(67.183,109.922) ; v1(74.672,7.874) 76.457,7.874 ccw(c76.457,10.414) 78.997,10.414 v1(78.997,24.384) 78.997,26.035 ccw(c76.457,26.035) 76.457,28.575 72.012,28.575 cw(c72.012,31.115) 69.472,31.115 v1(69.472,43.434) 69.472,45.469 cw(c71.628,45.469) 71.628,47.625 71.694,47.625 ccw(c71.694,50.165) 74.234,50.165 v1(74.234,62.484) 74.234,64.135 cw(c76.774,64.135) 76.774,66.675 81.22,66.675 ccw(c81.22,69.215) 83.76,69.215 v1(83.76,75.946)
  other v1: 66.675,91.806
col5: S204.2 S221.2 S238.2 S255.2 S269.2 U301.31 | length 172.1
  Component Side w0.254: U301.31@49.701,95.803 U301.31@49.903,96.006 ; U301.31@49.904,96.006 ccw(c48.952,96.957) 50.297,96.957 50.297,97.313 cw(c51.165,97.313) U301.31@50.551,97.926 ; S255.2@50.422,40.64 v1(50.422,43.434) ; U301.31@50.551,97.926 U301.31@50.726,98.101 50.726,98.119 53.002,100.395 53.02,100.395 53.564,100.939 ccw(c51.767,102.735) 54.307,102.735 54.307,105.355 ccw(c51.767,105.355) 53.564,107.151 S204.2@50.859,109.855 ccw(c50.39,110.325) 51.054,110.325 v1(51.054,111.633) ; S238.2@55.184,59.69 v1(55.184,62.484) ; S269.2@59.947,21.59 v1(59.947,24.384) ; v1(64.71,75.946) S221.2@64.709,78.74
  Bottom Layer w0.254: v1@51.054,111.887 cw(c52.104,110.837) 52.104,112.322 66.934,112.322 cw(c66.934,110.236) 68.092,111.972 cw(c66.513,109.982) 68.309,111.778 68.615,111.472 cw(c66.934,110.236) 69.02,110.236 69.02,107.188 69.02,97.028 69.02,95.587 ccw(c69.274,95.587) 69.023,95.551 ; v1(59.947,24.384) 59.947,26.035 ccw(c57.407,26.035) 57.407,28.575 52.962,28.575 cw(c52.962,31.115) 50.422,31.115 v1(50.422,43.434) 50.422,45.469 cw(c52.578,45.469) 52.578,47.625 52.644,47.625 ccw(c52.644,50.165) 55.184,50.165 v1(55.184,62.484) 55.184,64.135 cw(c57.724,64.135) 57.724,66.675 62.17,66.675 ccw(c62.17,69.215) 64.71,69.215 v1(64.71,75.946) 64.71,83.086 ccw(c64.456,83.087) 64.591,83.302 cw(c65.029,84.003) 64.678,84.752 ccw(c64.57,84.982) 64.793,84.86 cw(c66.37,84.003) 66.37,85.798 66.48,85.798 ; 68.966,90.262 68.966,95.025 69.02,95.079 ; 69.025,95.33 ccw(c68.204,95.433) 69.032,95.433 ; 66.48,85.798 ccw(c66.48,88.338) 69.02,88.338 69.02,95.079 ; 66.48,85.798 66.483,85.798 ccw(c66.483,88.338) 69.023,88.338 69.023,89.662 69.023,95.082 ; 69.02,95.079 69.023,95.082 ; 69.02,95.079 69.02,95.279 cw(c69.274,95.279) 69.023,95.315 ccw(c68.204,95.433) 69.025,95.329 ; 69.023,95.082 69.023,95.298 cw(c69.277,95.298) 69.025,95.329 ; 69.023,95.082 69.032,95.09 69.032,95.433 ; 69.023,95.551 cw(c68.204,95.433) 69.032,95.433 ; 69.023,95.551 cw(c68.204,95.433) 69.032,95.433 ; 69.023,95.551 cw(c68.204,95.433) 69.032,95.433 ; 69.025,95.329 ccw(c68.204,95.433) 69.032,95.433
col6: S205.2 S222.2 S239.2 S256.2 S270.2 U301.22 | length 225.6
  Component Side w0.254: S256.2@31.372,40.64 v1(31.372,43.434) ; S239.2@36.134,59.69 v1(36.134,62.484) ; S270.2@40.897,21.59 v1(40.897,24.384) ; S222.2@45.659,78.74 v1(45.66,75.946) ccw(c47.184,75.946) 47.184,74.422 48.387,74.422 ccw(c48.387,75.565) 49.53,75.565 49.53,76.327 cw(c52.07,76.327) 52.07,78.867 55.463,78.867 ccw(c55.463,81.407) 57.259,79.611 58.637,80.989 cw(c60.433,79.193) 60.433,81.733 63.606,81.733 cw(c63.608,81.479) 63.732,81.7 ccw(c65.029,84.003) 64.394,81.438 64.398,81.436 ccw(c65.029,84.003) 66.432,81.763 ccw(c65.029,84.003) 67.668,84.162 cw(c67.921,84.177) 67.667,84.177 67.667,87.089 ccw(c63.311,87.089) 66.395,90.166 ccw(c63.311,87.089) 66.391,90.17 66.246,90.315 64.563,91.998 ccw(c61.482,88.918) 61.482,93.274 59.941,93.274 ccw(c59.941,88.918) 56.86,91.998 ; v1(45.66,104.521) S205.2@45.659,107.315 ; U301.22@52.53,91.808 53.801,91.808 cw(c53.801,89.756) U301.22@55.252,91.207 ccw(c55.252,93.15) 56.626,91.776 56.854,92.004
  Bottom Layer w0.254: v1(40.897,24.384) 40.897,26.035 ccw(c38.357,26.035) 38.357,28.575 33.912,28.575 cw(c33.912,31.115) 31.372,31.115 v1(31.372,43.434) 31.372,45.469 cw(c33.655,45.469) 33.655,47.752 ccw(c33.655,50.231) 36.134,50.231 v1(36.134,62.484) 36.134,64.135 cw(c38.674,64.135) 38.674,66.675 43.12,66.675 ccw(c43.12,69.215) 45.66,69.215 v1(45.66,75.946) 45.66,81.988 ccw(c43.12,81.988) 43.12,84.528 21.568,84.528 cw(c21.568,87.068) 19.028,87.068 19.028,109.328 cw(c21.568,109.328) 21.568,111.868 43.12,111.868 cw(c43.12,109.328) 45.66,109.328 v1(45.66,104.521)
col7: S206.2 S223.2 S240.2 S257.2 S271.2 U301.21 | length 202.5
  Component Side w0.254: v1(3.205,107.061) S206.2@3.204,109.855 ; S257.2@12.322,40.64 v1(12.322,43.434) ; S240.2@17.084,59.69 v1(17.084,62.484) ; S271.2@21.847,21.59 v1(21.847,24.384) ; v1(26.61,75.946) S223.2@26.609,78.74 26.609,80.822 cw(c29.149,80.822) 29.149,83.362 35.596,83.362 cw(c35.596,81.276) 36.956,82.858 37.113,82.701 ccw(c39.358,84.951) 37.294,82.534 37.301,82.528 ccw(c41.127,86.847) 38.881,81.532 ccw(c41.127,86.847) 40.587,81.102 ccw(c41.127,86.847) 41.127,81.077 44.159,81.077 ccw(c44.159,85.433) 45.825,81.408 ccw(c44.159,85.433) 46.888,82.038 cw(c47.046,81.839) 46.896,82.044 ccw(c45.72,83.658) 47.132,82.246 47.441,82.555 cw(c47.621,82.375) 47.472,82.581 ccw(c47.206,82.949) 47.528,82.629 cw(c48.956,81.199) 48.956,83.22 52.071,83.22 cw(c52.072,82.966) 52.094,83.219 ccw(c52.324,85.852) 52.554,83.219 cw(c52.576,82.966) 52.577,83.22 53.067,83.22 ccw(c53.067,84.836) 53.727,83.361 cw(c54.214,82.288) 54.052,83.455 cw(c54.086,83.203) 54.087,83.457 56.553,83.457 cw(c56.553,82.055) 57.263,83.264 cw(c57.134,83.045) 57.291,83.245 ccw(c59.359,85.884) 57.413,83.154 cw(c57.266,82.947) 57.434,83.137 ccw(c59.945,85.98) 59.945,82.187 63.731,82.187 cw(c63.732,81.933) 63.867,82.148 ccw(c65.029,84.003) 66.397,82.294 ccw(c65.029,84.003) 67.214,84.146 cw(c67.467,84.163) 67.213,84.163 67.213,84.582 67.213,87.089 ccw(c63.311,87.089) 67.122,87.926 ccw(c63.311,87.089) 66.073,89.845 ccw(c63.311,87.089) 66.071,89.848 65.831,90.088 64.242,91.677 ccw(c61.482,88.918) 64.241,91.678 ccw(c61.482,88.918) 61.482,92.82 59.941,92.82 ccw(c59.941,88.918) 57.182,91.678 ccw(c59.941,88.918) 57.181,91.677 55.98,90.475 ; U301.21@52.176,91.455 52.383,91.248 ccw(c52.964,91.83) 52.964,91.007 53.804,91.007 cw(c53.804,89.759) U301.21@54.686,90.641 ; U301.21@54.686,90.641 54.907,90.421 ccw(c55.377,90.892) 55.377,90.226 ccw(c55.377,91.078) 55.979,90.475
  Bottom Layer w0.254: v1(3.205,107.061) 3.205,101.727 ccw(c5.745,101.727) 5.745,99.187 10.033,99.187 cw(c10.033,96.647) 12.573,96.647 12.573,86.614 ccw(c15.113,86.614) 15.113,84.074 24.07,84.074 cw(c24.07,81.534) 26.61,81.534 v1(26.61,75.946) 26.61,69.215 cw(c24.07,69.215) 24.07,66.675 19.624,66.675 ccw(c19.624,64.135) 17.084,64.135 v1(17.084,62.484) 17.084,49.977 cw(c14.732,49.977) 14.732,47.625 ccw(c14.732,45.215) 12.322,45.215 v1(12.322,43.434) 12.322,31.115 ccw(c14.862,31.115) 14.862,28.575 19.307,28.575 cw(c19.307,26.035) 21.847,26.035 v1(21.847,24.384)
col8: S207.2 S224.2 S241.2 S258.2 S272.2 S283.1 U301.20 | length 250.3
  Component Side w0.254: v1(-15.815,107.061) S207.2@-15.816,109.855 ; S258.2@-6.728,40.64 v1(-6.728,43.434) ; S283.1@-6.29,5.08 v1(-6.29,7.874) ; S241.2@-1.966,59.69 v1(-1.966,62.484) ; S272.2@2.797,21.59 v1(2.797,24.384) ; v1(7.56,75.946) S224.2@7.559,78.74 7.559,80.791 cw(c10.099,80.791) 10.099,83.331 14.198,83.331 ccw(c14.198,92.004) 17.021,83.803 cw(c17.104,83.563) 17.105,83.817 21.308,83.817 cw(c21.309,83.563) 21.314,83.817 ccw(c21.386,87.045) 21.386,83.816 35.596,83.816 cw(c35.596,81.276) 37.266,83.19 37.434,83.022 ccw(c39.358,84.951) 37.595,82.874 cw(c37.432,82.679) 37.6,82.87 ccw(c41.127,86.847) 40.076,81.636 ccw(c41.127,86.847) 41.127,81.531 44.159,81.531 ccw(c44.159,85.433) 46.918,82.673 47.152,82.908 cw(c47.332,82.728) 47.206,82.949 cw(c48.956,81.199) 48.956,83.674 52.091,83.674 cw(c52.092,83.42) 52.116,83.673 ccw(c52.324,85.852) 52.531,83.673 cw(c52.556,83.42) 52.557,83.674 53.067,83.674 ccw(c53.067,84.836) 53.542,83.775 cw(c54.214,82.288) 54.043,83.911 56.553,83.911 cw(c56.553,82.055) 57.526,83.635 cw(c57.393,83.419) 57.551,83.618 ccw(c59.359,85.884) 57.694,83.511 cw(c57.549,83.303) 57.718,83.492 ccw(c59.945,85.98) 57.866,83.367 ccw(c59.945,85.98) 59.945,82.641 63.955,82.641 ccw(c65.029,84.003) 65.7,82.403 ccw(c65.029,84.003) 66.76,84.129 cw(c67.013,84.147) 66.759,84.147 66.759,85.852 ; U301.20@51.822,91.101 52.06,90.863 ccw(c52.837,91.64) 52.677,90.553 52.968,90.553 cw(c52.968,88.924) U301.20@54.121,90.076 54.205,89.991 ccw(c55.171,90.958) 55.171,89.591 ccw(c55.171,90.996) 56.032,89.885 57.502,91.356 cw(c59.941,88.918) 59.941,92.366 61.482,92.366 cw(c61.482,88.918) 63.921,91.356 65.129,90.148 65.751,89.525 cw(c63.311,87.089) 65.753,89.524 cw(c63.311,87.089) 66.759,87.089 66.759,85.852 ; 66.759,85.653 66.759,85.852
  Bottom Layer w0.254: v1(-15.815,107.061) -15.815,99.441 ccw(c-13.275,99.441) -13.275,96.901 5.02,96.901 cw(c5.02,94.361) 7.56,94.361 v1(7.56,75.946) 7.56,69.215 cw(c5.02,69.215) 5.02,66.675 0.574,66.675 ccw(c0.574,64.135) -1.966,64.135 v1(-1.966,62.484) -1.966,50.165 cw(c-4.506,50.165) -4.506,47.625 -4.572,47.625 ccw(c-4.572,45.469) -6.728,45.469 v1(-6.728,43.434) -6.728,31.115 ccw(c-4.188,31.115) -4.188,28.575 0.257,28.575 cw(c0.257,26.035) 2.797,26.035 v1(2.797,24.384) 2.797,10.414 cw(c0.257,10.414) 0.257,7.874 v1(-6.29,7.874)
col9: S208.2 S225.2 S242.2 S259.2 S273.2 U301.19 | length 242
  Component Side w0.254: v1(-34.865,107.061) S208.2@-34.866,109.855 ; S259.2@-25.778,40.64 v1(-25.778,43.434) ; S242.2@-21.016,59.69 v1(-21.016,62.484) ; S273.2@-16.253,21.59 v1(-16.253,24.384) ; v1(-11.49,75.946) S225.2@-11.491,78.74 -11.491,81.245 cw(c-8.951,81.245) -8.951,83.785 14.198,83.785 ccw(c14.198,92.004) 16.942,84.256 cw(c17.027,84.017) 17.028,84.271 21.313,84.271 cw(c21.314,84.017) 21.32,84.271 ccw(c21.386,87.045) 21.386,84.27 35.784,84.27 cw(c35.784,81.73) 37.454,83.644 37.626,83.473 37.656,83.442 37.754,83.344 ccw(c39.358,84.951) 37.893,83.217 cw(c37.729,83.023) 37.898,83.212 ccw(c41.127,86.847) 39.77,82.178 ccw(c41.127,86.847) 41.127,81.985 44.159,81.985 ccw(c44.159,85.433) 46.597,82.995 46.986,83.384 cw(c48.782,81.588) 48.782,84.128 52.114,84.128 cw(c52.115,83.874) 52.142,84.127 ccw(c52.324,85.852) 52.506,84.127 cw(c52.533,83.874) 52.534,84.128 53.067,84.128 ccw(c53.067,84.836) 53.356,84.19 cw(c54.214,82.288) 54.02,84.365 54.031,84.365 cw(c54.033,84.111) 54.032,84.365 cw(c54.033,84.111) 54.034,84.365 56.553,84.365 cw(c56.553,82.055) 57.767,84.021 cw(c57.393,83.419) 57.835,83.972 ccw(c59.359,85.884) 57.954,83.883 cw(c57.549,83.303) 58.02,83.831 ; U301.19@51.469,90.747 51.817,90.399 ccw(c52.542,91.123) 52.542,90.099 cw(c52.542,89.075) 53.266,89.799 U301.19@53.555,89.51 U301.19@53.573,89.491 ; U301.19@53.574,89.491 ccw(c54.996,90.914) 54.996,88.902 ccw(c54.996,90.577) 56.181,89.393 57.823,91.035 ; 57.824,91.036 cw(c59.941,88.918) 59.941,91.912 61.482,91.912 cw(c61.482,88.918) 63.599,91.036 ; 58.372,83.561 cw(c59.945,85.98) 58.022,83.83 ccw(c57.549,83.303) 58.02,83.831 ; 63.6,91.035 65.296,89.339 65.431,89.204 cw(c63.311,87.089) 66.305,87.089 66.305,84.963 66.305,84.129 ccw(c66.559,84.129) 66.306,84.108 cw(c65.029,84.003) 66.139,83.362 cw(c65.029,84.003) 64.192,83.033 ccw(c64.027,82.841) 64.025,83.095 59.945,83.095 cw(c59.945,85.98) 58.02,83.831
  Bottom Layer w0.254: v1(-34.865,107.061) -34.865,97.409 ccw(c-32.325,97.409) -32.325,94.869 -14.03,94.869 cw(c-14.03,92.329) -11.49,92.329 v1(-11.49,75.946) -11.49,69.215 cw(c-14.03,69.215) -14.03,66.675 -18.476,66.675 ccw(c-18.476,64.135) -21.016,64.135 v1(-21.016,62.484) -21.016,50.165 cw(c-23.556,50.165) -23.556,47.625 -23.622,47.625 ccw(c-23.622,45.469) -25.778,45.469 v1(-25.778,43.434) -25.778,31.115 ccw(c-23.238,31.115) -23.238,28.575 -18.793,28.575 cw(c-18.793,26.035) -16.253,26.035 v1(-16.253,24.384)
col10: S209.2 S226.2 S243.2 S260.2 S274.2 U301.18 | length 260.4
  Component Side w0.254: v1(-53.915,107.061) S209.2@-53.916,109.855 ; S260.2@-44.828,40.64 v1(-44.828,43.434) ; S243.2@-40.066,59.69 v1(-40.066,62.484) ; S274.2@-35.302,21.59 v1(-35.303,24.384) ; v1(-30.54,75.946) S226.2@-30.541,78.74 -30.541,81.699 cw(c-28.001,81.699) -28.001,84.239 14.198,84.239 ccw(c14.198,92.004) 16.861,84.71 cw(c16.948,84.471) 16.949,84.725 21.318,84.725 cw(c21.32,84.471) 21.326,84.725 ccw(c21.386,87.045) 21.386,84.724 36.033,84.724 cw(c36.034,84.47) 36.043,84.724 cw(c35.972,82.185) 37.641,84.099 38.05,83.691 38.075,83.665 ccw(c39.358,84.951) 38.19,83.56 cw(c38.026,83.366) 38.195,83.555 ccw(c41.127,86.847) 40.759,82.454 ccw(c41.127,86.847) 41.127,82.439 44.159,82.439 ccw(c44.159,85.433) 45.867,82.974 ccw(c44.159,85.433) 46.277,83.317 46.584,83.624 46.798,83.838 cw(c48.594,82.042) 48.594,84.582 52.139,84.582 cw(c52.141,84.328) 52.171,84.58 ccw(c52.324,85.852) 52.477,84.58 cw(c52.507,84.328) 52.509,84.582 53.067,84.582 ccw(c53.067,84.836) 53.171,84.604 ; U301.18@51.115,90.394 51.745,89.764 ccw(c52.47,90.488) 52.102,89.532 cw(c52.102,88.809) 52.404,89.466 cw(c52.102,88.809) 52.613,89.321 U301.18@52.989,88.944 ; U301.18@52.99,88.943 ccw(c54.188,90.143) 54.188,88.448 55.33,88.448 ccw(c55.33,89.773) 56.266,88.836 58.145,90.714 cw(c59.941,88.918) 59.941,91.458 61.482,91.458 cw(c61.482,88.918) 63.278,90.714 65.107,88.885 cw(c63.311,87.089) 65.851,87.089 65.851,84.096 cw(c65.029,84.003) 64.405,83.461 ccw(c64.213,83.295) 64.211,83.549 59.945,83.549 cw(c59.945,85.98) 58.228,84.259 ; 53.172,84.604 cw(c54.214,82.288) 53.979,84.817 cw(c54.021,84.365) 53.981,84.817 cw(c54.021,84.365) 53.989,84.818 ccw(c53.971,85.071) 54.001,84.819 56.646,84.819 cw(c56.646,82.302) 58.223,84.264 ccw(c59.945,85.98) 58.226,84.261 ccw(c59.945,85.98) 58.228,84.259 ; 58.426,84.082 cw(c59.945,85.98) 58.228,84.259
  Bottom Layer w0.254: v1(-53.915,107.061) -53.915,95.758 ccw(c-51.375,95.758) -51.375,93.218 -33.08,93.218 cw(c-33.08,90.678) -30.54,90.678 v1(-30.54,75.946) -30.54,69.215 cw(c-33.08,69.215) -33.08,66.675 -37.526,66.675 ccw(c-37.526,64.135) -40.066,64.135 v1(-40.066,62.484) -40.066,49.847 cw(c-42.288,49.847) -42.288,47.625 ccw(c-42.288,45.085) -44.828,45.085 v1(-44.828,43.434) -44.828,31.115 ccw(c-42.288,31.115) -42.288,28.575 -37.843,28.575 cw(c-37.843,26.035) -35.303,26.035 v1(-35.303,24.384)